# EAGLE board Sample2 (EAGLE 9.6.2)
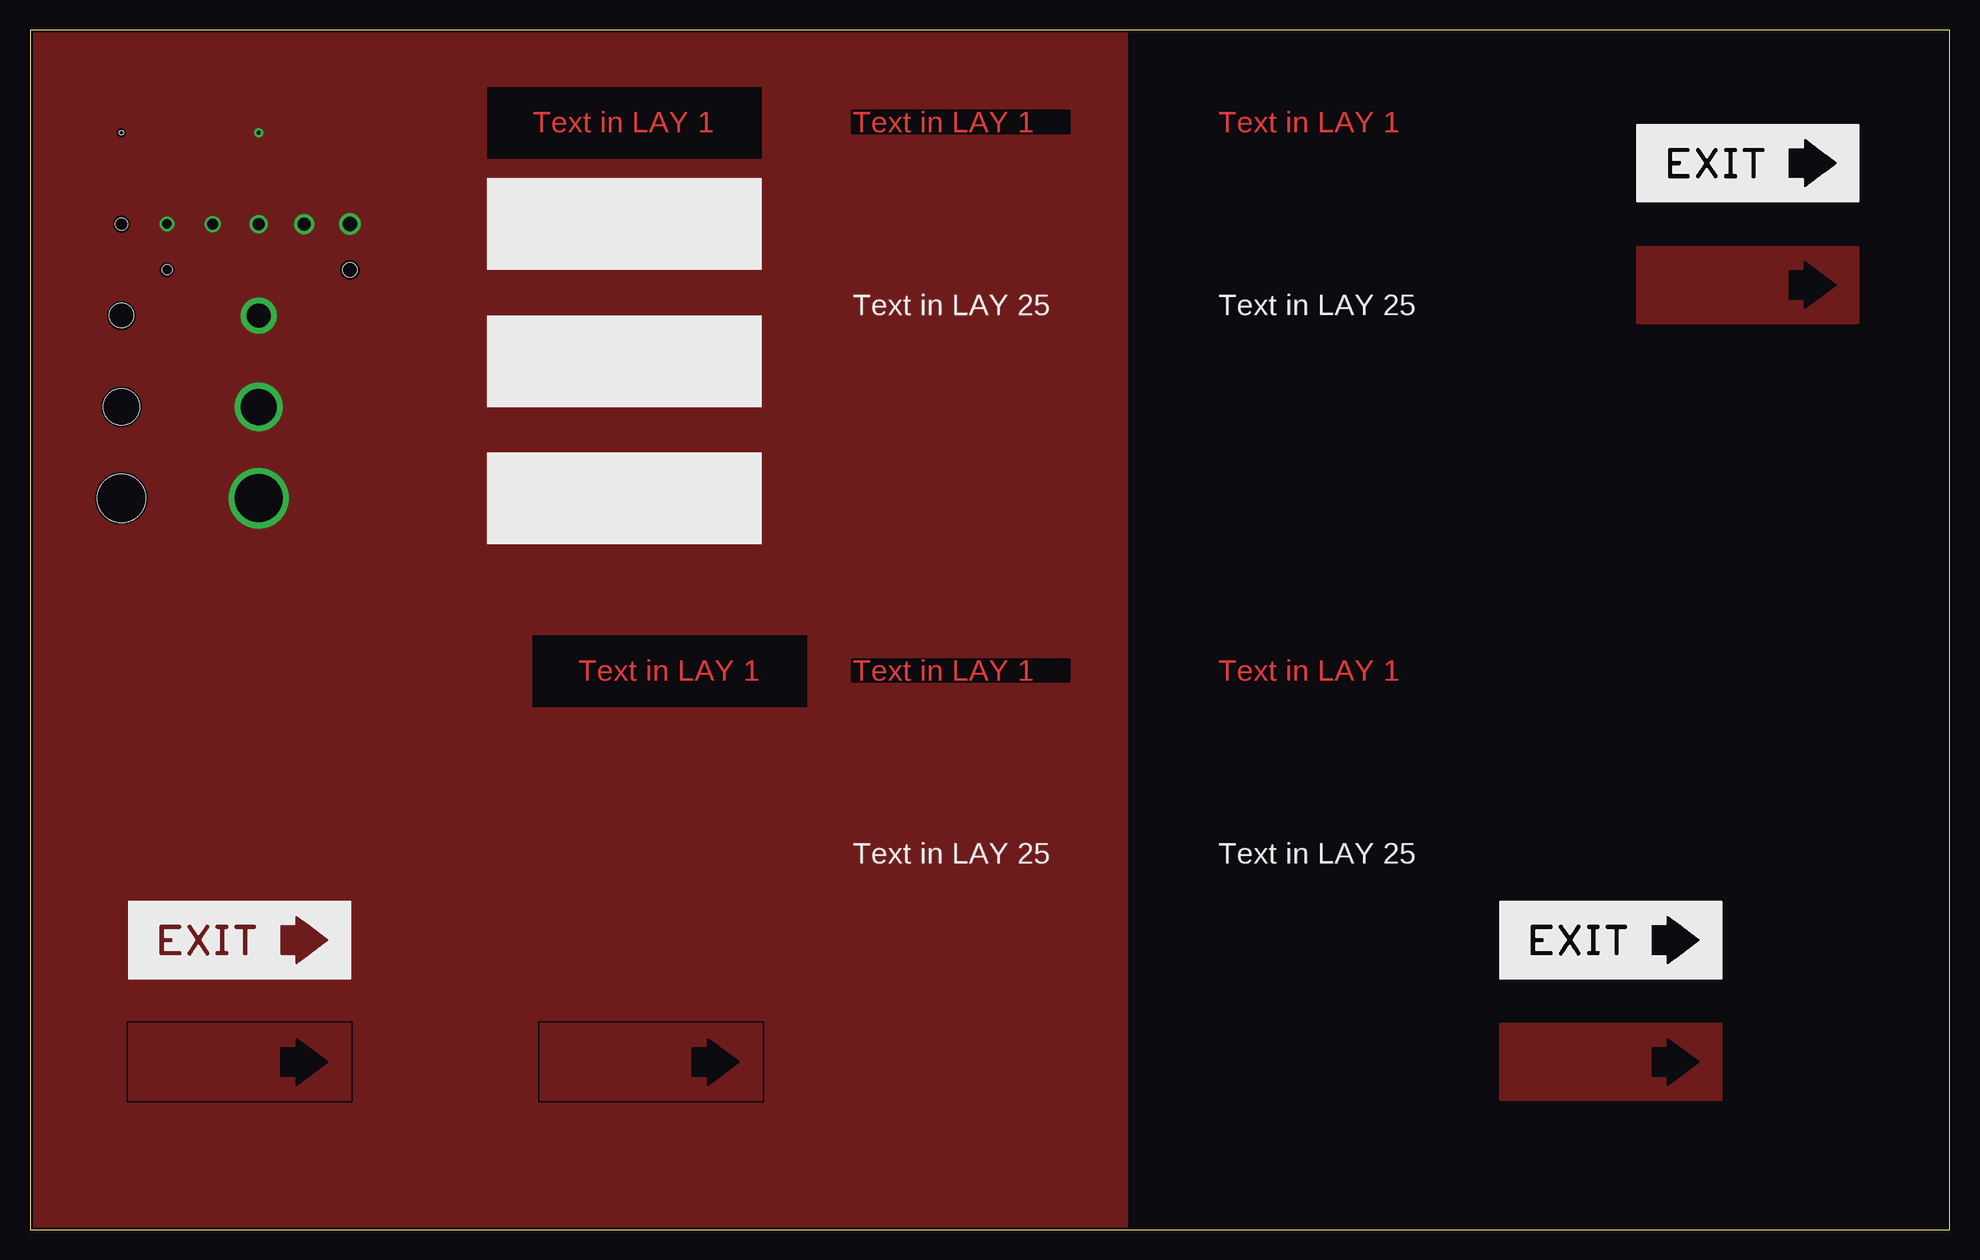
[diagram p0: board, top side]
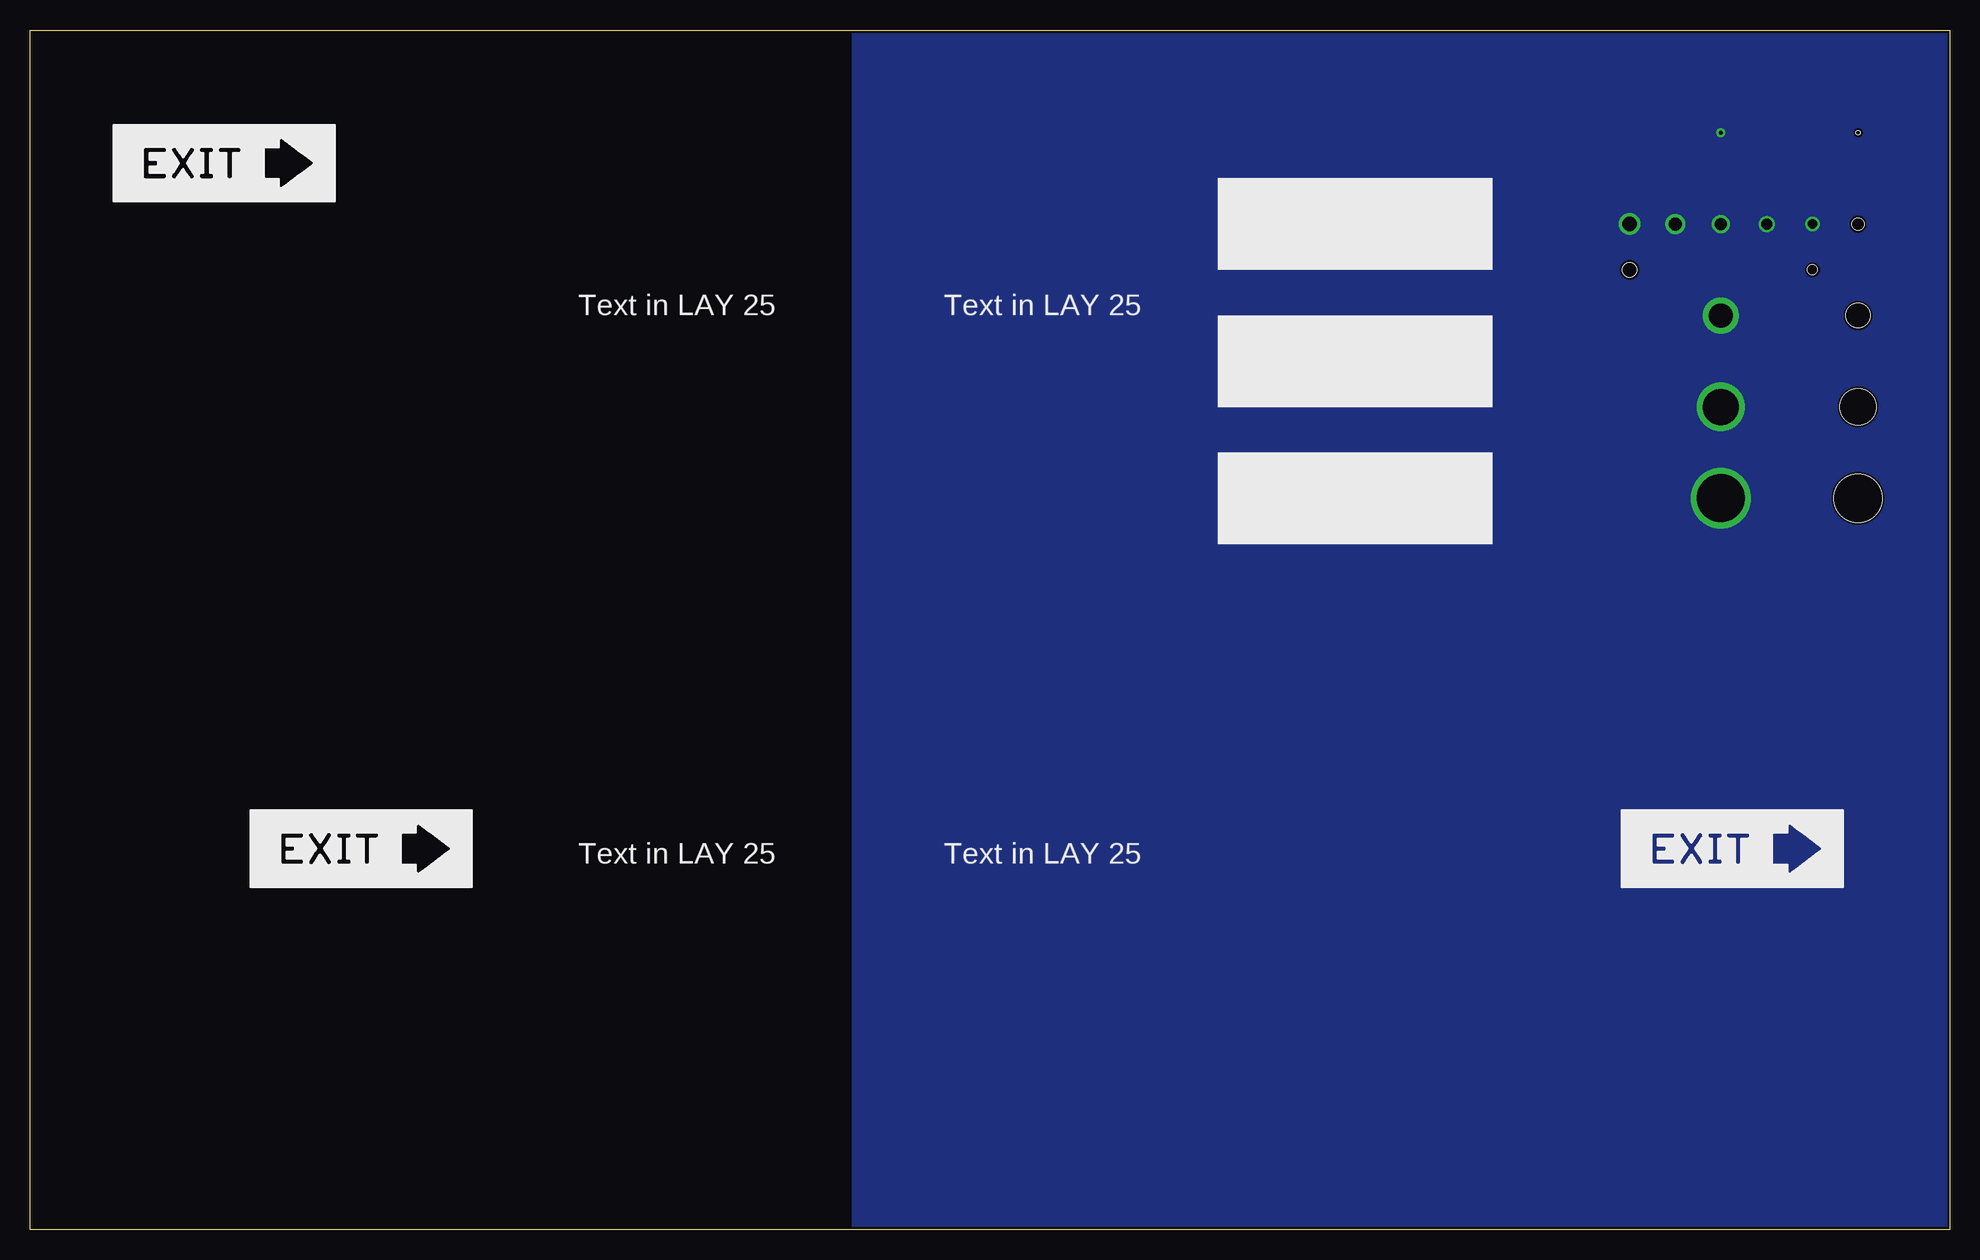
[diagram p1: board, bottom side, seen from below]

Size 160 x 100 mm. Coordinates in mm from the lower left corner, seen from the top.
Outline: 0,0 160,0 160,100 0,100 0,0
Copper layers (1*16): Top 0.035mm / dielectric 1.5mm / Bottom 0.035mm
Design rules "default *": minimum track width 6mil, minimum drill 0.35mm, track to track 6mil, track to pad 6mil, pad to pad 6mil, via to via 6mil, smd to smd 6mil, copper to edge 8mil, drill to drill 6mil, minimum pad ring 10mil, minimum via ring 8mil, stop-mask expansion 4mil, vias tented up to drill 1mm, thermal gap 10mil
Holes 0.35 mm at 7.62,91.44
Holes 1 mm at 7.62,83.82
Holes 2 mm at 7.62,76.2
Holes 3 mm at 7.62,68.58
Holes 4 mm at 7.62,60.96
Holes 0.8 mm at 11.43,80.01
Holes 1.2 mm at 26.67,80.01
tRestrict: area 38.1,89.3 to 61,95.2; area 41.9,43.6 to 64.8,49.5; area 21,12.1 to 24.8,15.9; area 146.7,76.8 to 150.5,80.6; area 135.3,12.1 to 139.1,15.9; area 55.2,12.1 to 59.1,15.9

## Placement (x,y rotation side)
E$1  [EXIT]  8.26,20.95 0 top
E$2  [EXIT]  133.99,85.72 0 top
E$3  [EXIT]  122.56,20.95 0 top
E$4  [EXIT]  153.03,85.72 0 bottom
E$5  [EXIT]  141.6,28.57 0 bottom
E$6  [EXIT]  27.3,28.57 0 bottom

## Library data of the parts
E$1-E$6 = negasilk

## Tracks (layer width: path | path; a pad name or v marks a point on that pad's centre or on a via)
GND  (via drill 0.35, 0.8, 0.9, 1, 1.1, 1.2, 2, 3, 4)
  other vias: 19.05,91.44 19.05,83.82 19.05,76.2 19.05,68.58 19.05,60.96 15.24,83.82 22.86,83.82 26.67,83.82 11.43,83.82
  pour Bottom (rank 2): 0,100 91.42,100 91.42,0 0,0
  pour Top (rank 2): 0,100 91.42,100 91.42,0 0,0
S$1
  pour Top: 8.26,10.79 8.26,17.14 26.67,17.14 26.67,10.79
S$2
  pour Top: 133.99,75.56 133.99,81.92 152.4,81.92 152.4,75.56
S$3
  pour Top: 122.56,10.79 122.56,17.14 140.97,17.14 140.97,10.79
S$4
  pour Top: 42.55,10.79 42.55,17.14 60.96,17.14 60.96,10.79

## Text on the board
Top: Text in LAY 1 | Text in LAY 1 | Text in LAY 1 | Text in LAY 1 | Text in LAY 1 | Text in LAY 1
tNames: Text in LAY 25 | Text in LAY 25 | Text in LAY 25 | Text in LAY 25
bNames: Text in LAY 25 | Text in LAY 25 | Text in LAY 25 | Text in LAY 25
tStop: Text in LAY 29 | Text in LAY 29 | Text in LAY 29 | Text in LAY 29 | Text in LAY 29
tRestrict: EXIT | Text in LAY 39 | Text in LAY 39 | Text in LAY 39 | Text in LAY 39 | EXIT | EXIT | EXIT